# Altium PCB Main.PcbDoc
Units mil, origin at the board's own origin, x right, y up, seen from the top; angles counter-clockwise.
Board outline 2430 x 2950 mil, 2 copper layers (Top Layer, Bottom Layer); 33 components, 26 nets, 160 pads, 36 vias.
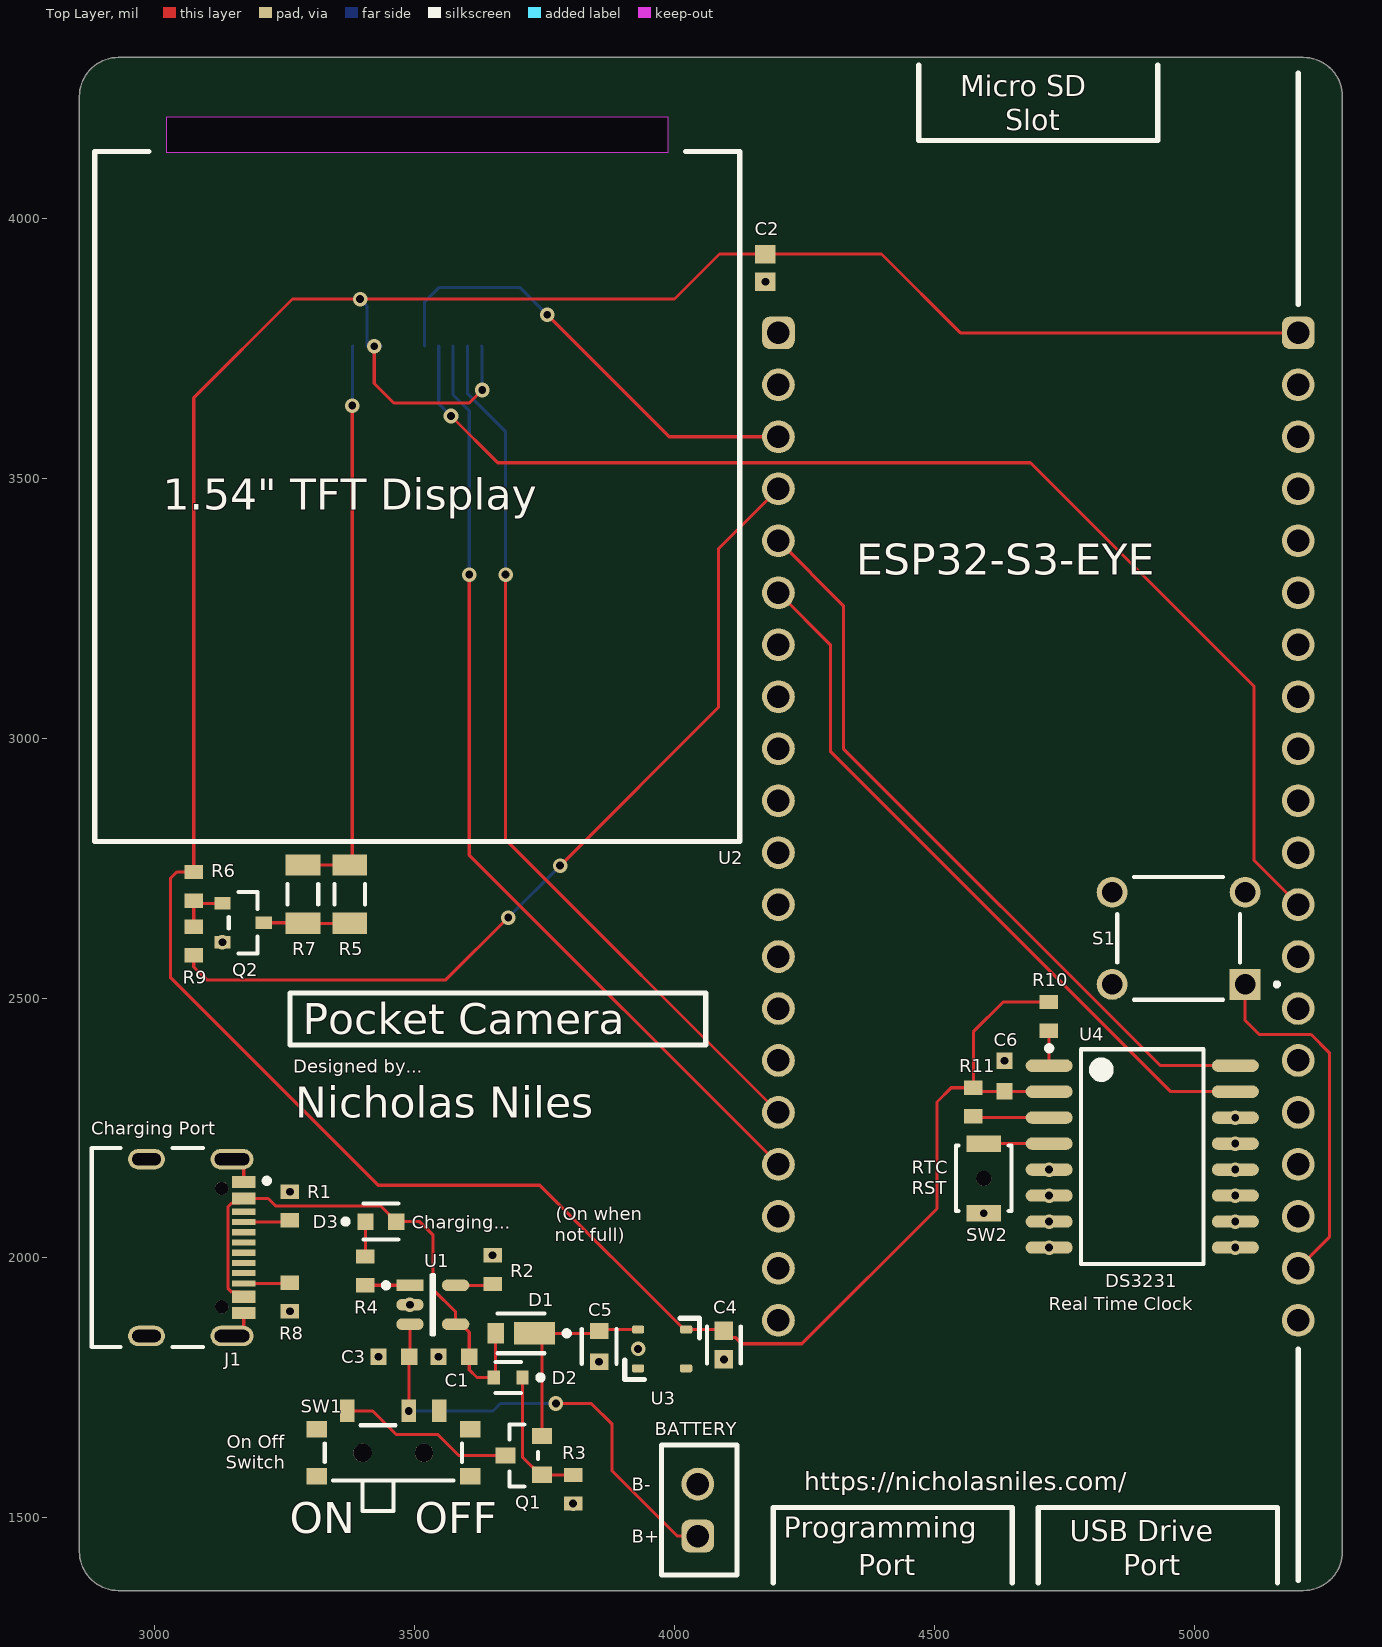
[diagram p0: Top Layer view]
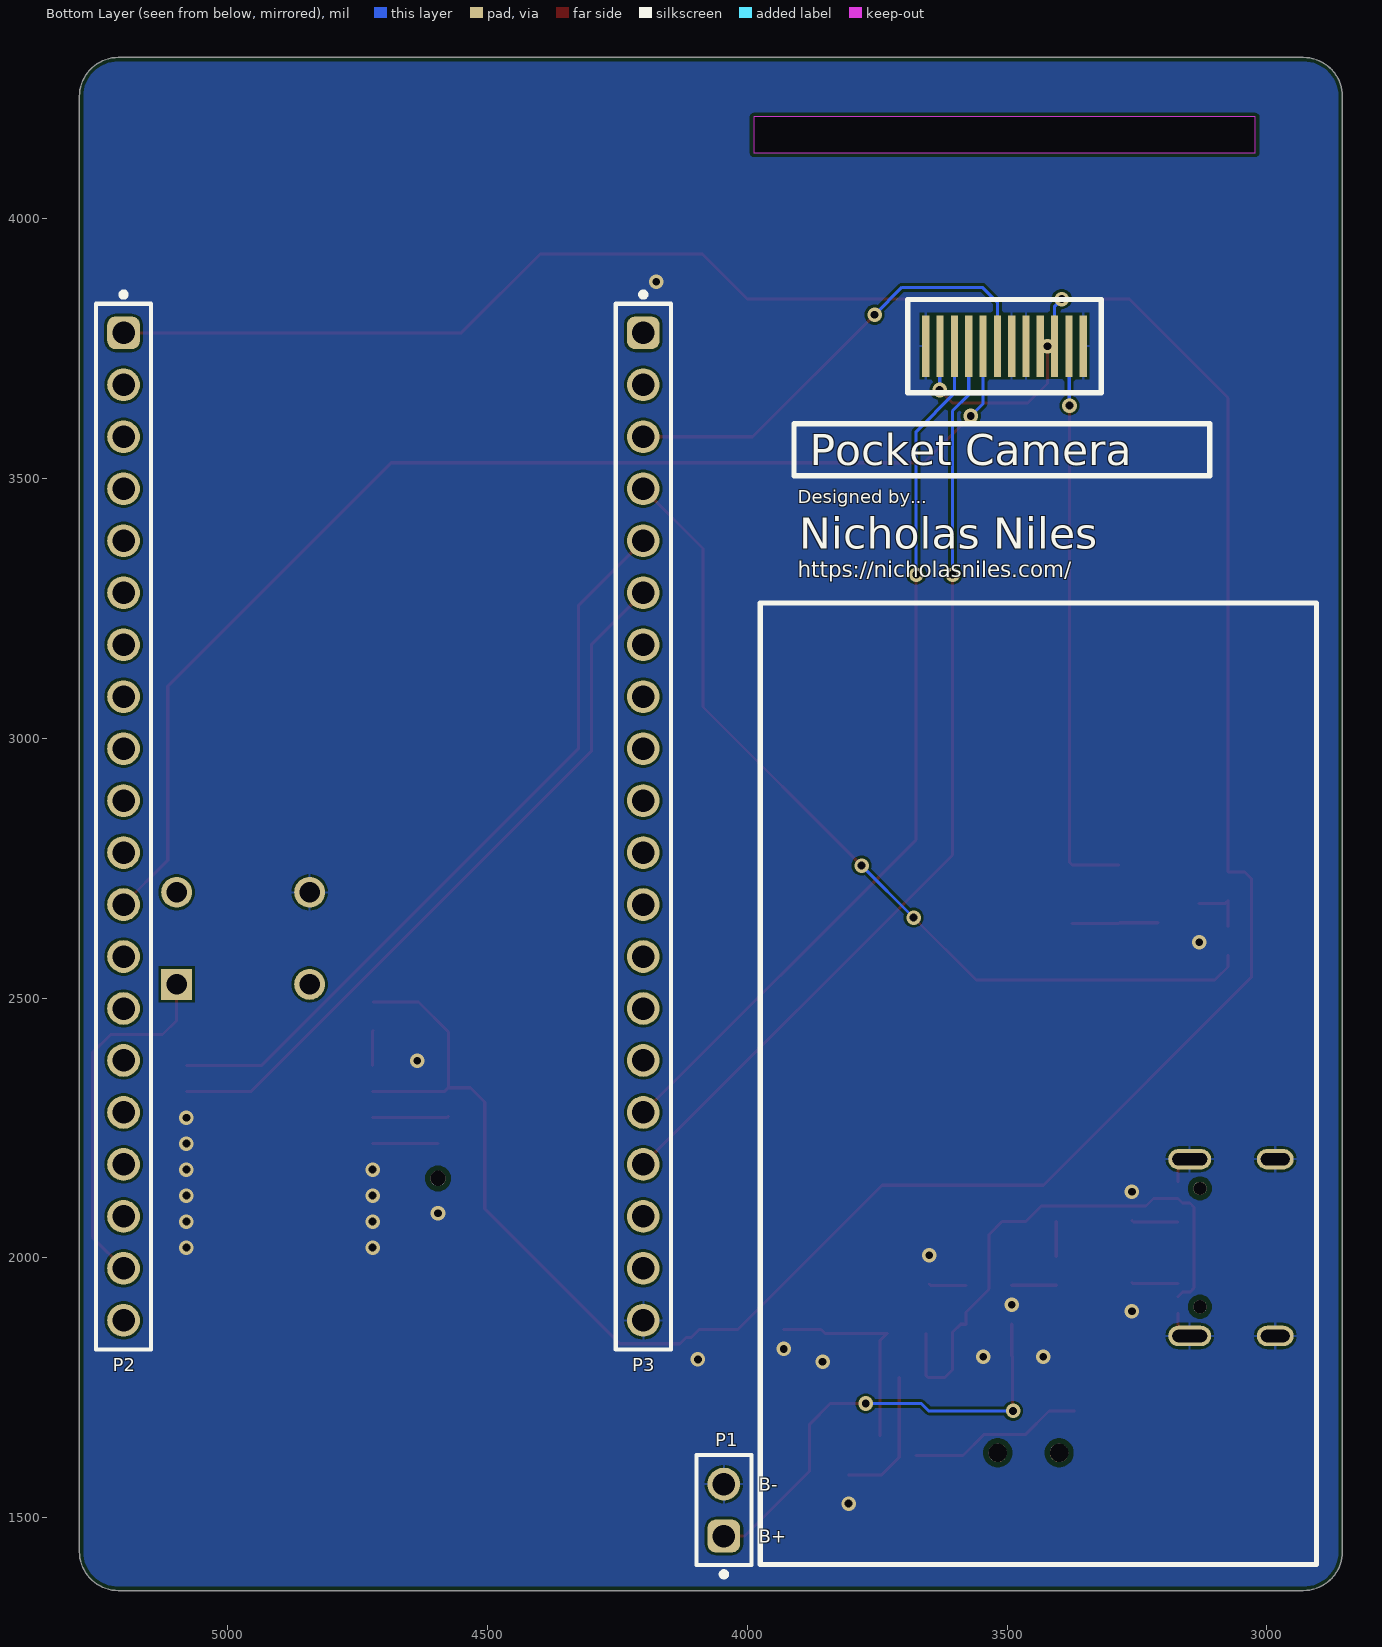
[diagram p1: Bottom Layer view, seen from below]
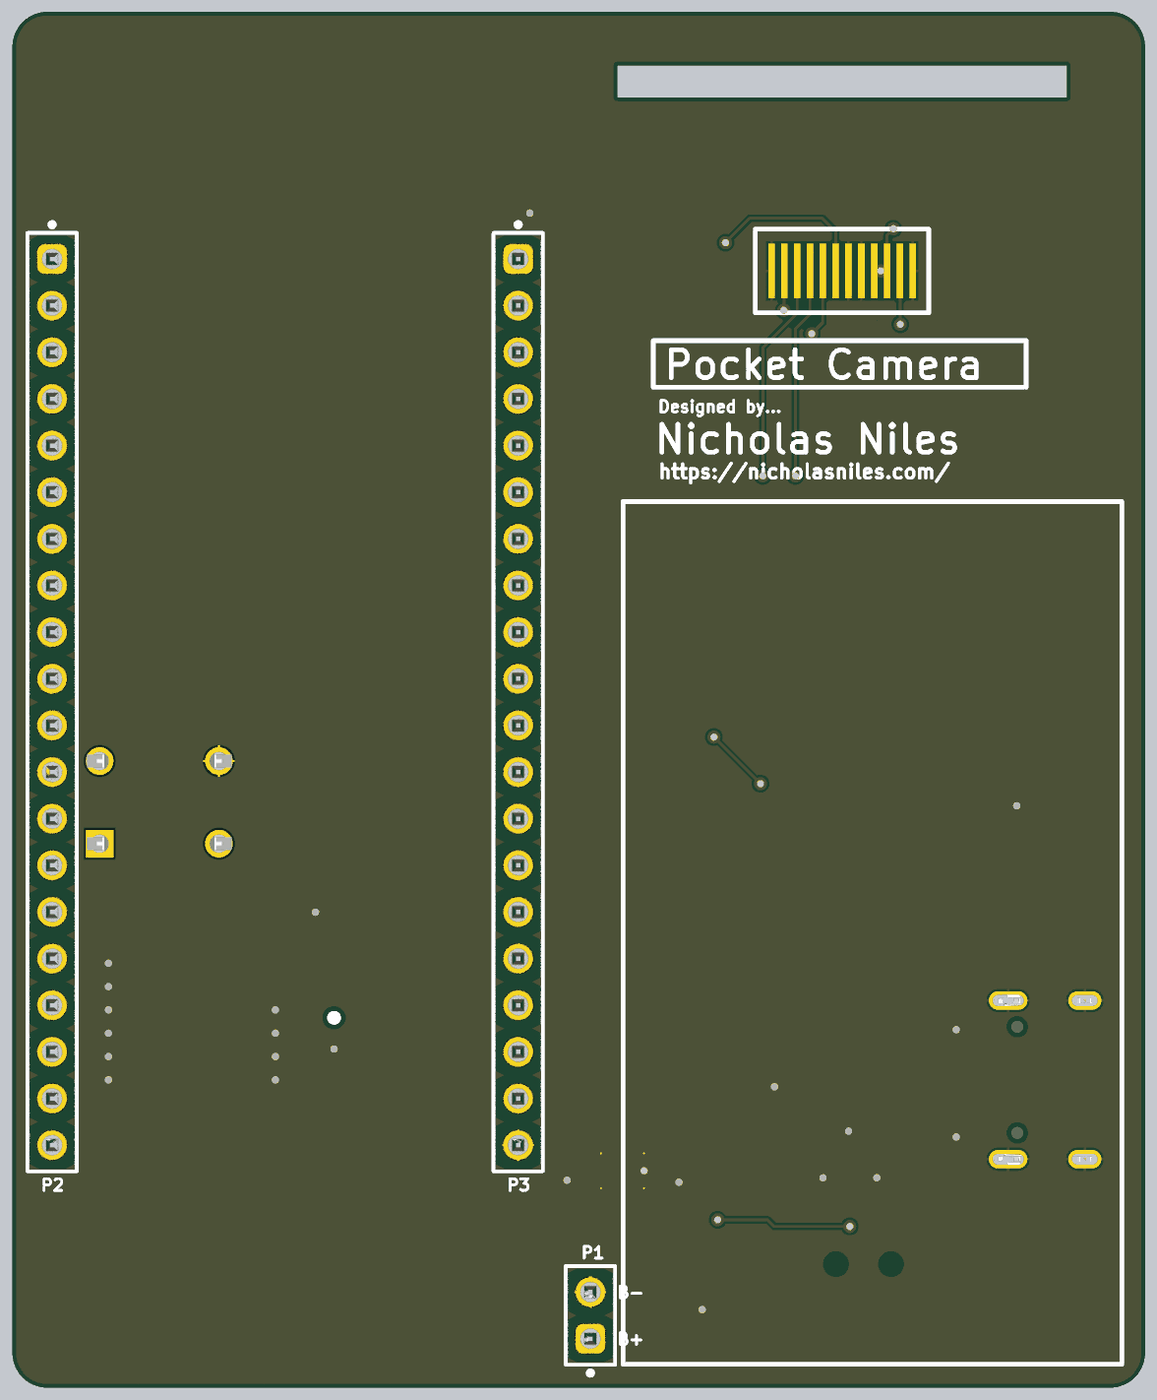
[diagram p2: 3D render of the assembled board from below, using the file's embedded part models]

## Layer stack, top to bottom
Top Solder: solder mask 0.4, Solder Resist, Dk 3.5
Top Layer: signal copper 1.4
Dielectric 1: dielectric 12.6, FR-4, Dk 4.8
Bottom Layer: signal copper 1.4
Bottom Solder: solder mask 0.4, Solder Resist, Dk 3.5

## Board outline
2855,1435 2855,4235 cw(c2930,4235) 2930,4310 5210,4310 cw(c5210,4235) 5285,4235 5285,1435 cw(c5210,1435) 5210,1360 2930,1360 cw(c2930,1435)

## Design rules (kind name [scope] priority, off if disabled: settings)
BoardOutlineClearance [All] p1: gap=7.87 ignorepadtopadclearanceinfootprint=FALSE
Clearance [All] p1: gap=5 ignorepadtopadclearanceinfootprint=TRUE except(10: Arc-Hole Track-Hole SMDPad-Hole THPad-Hole Via-Hole Fill-Hole Poly-Hole Region-Hole Text-Hole)
ComponentClearance [All] p1: gap=5 collisioncheckmode=3 verticalgap=5 showdistances=TRUE
DiffPairsRouting [All] p1: maxlimit=10 minlimit=5 mostfreqgap=5 toplayer_minwidth=5 toplayer_maxwidth=1000 toplayer_prefwidth=5 bottomlayer_minwidth=5 bottomlayer_maxwidth=1000 bottomlayer_prefwidth=5 maxuncoupledlength=500
Height [All] p1: minheight=0 maxheight=71497.94 prefheight=500
HoleSize [All] p1: absolutevalues=TRUE maxlimit=248.03 minlimit=11.81 maxpercent=80.000 minpercent=20.000
HoleToHoleClearance [All] p1: gap=10 allowstackedmicrovias=FALSE
MinimumAnnularRing [All] p1: minimumring=6
MinimumSolderMaskSliver [All] p1: minsoldermaskwidth=6
PlaneClearance [All] p1: clearance=5
PlaneConnect PlaneConnectPowerPads [InPadClass('PowerPads')] p1: planeconnectstyle=Direct reliefexpansion=20 reliefentries=4 reliefconductorwidth=10 reliefairgap=10
PlaneConnect [All] p2: pad.planeconnectstyle=Relief pad.reliefexpansion=11.81 pad.reliefentries=4 pad.reliefconductorwidth=5 pad.reliefairgap=5 via.planeconnectstyle=Direct via.reliefexpansion=11.81 via.reliefentries=4 via.reliefconductorwidth=5 via.reliefairgap=5
PolygonConnect PolygonConnectPowerPads [All vs (InPadClass('PowerPads'))] p1: connectstyle=Direct reliefconductorwidth=10 reliefentries=4 polygonreliefangle="90 Angle" airgapwidth=10
PolygonConnect [All] p2: thpad.connectstyle=Relief thpad.reliefconductorwidth=5 thpad.reliefentries=4 thpad.polygonreliefangle="90 Angle" thpad.airgapwidth=5 smdpad.connectstyle=Relief smdpad.reliefconductorwidth=5 smdpad.reliefentries=4 smdpad.polygonreliefangle="90 Angle" smdpad.airgapwidth=5 via.connectstyle=Direct via.reliefconductorwidth=5 via.reliefentries=4 via.polygonreliefangle="90 Angle" via.airgapwidth=5
RoutingVias [All] p1: holewidth=11.81 width=23.62 viastyle="Through Hole" minholewidth=11.81 minwidth=23.62 maxholewidth=23.62 maxwidth=259.84
SilkToSilkClearance [All] p1: silktosilkclearance=5
SilkToSolderMaskClearance [IsPad] p1: minsilkscreentomaskgap=5 clearancetoexposedcopper=TRUE
SolderMaskExpansion [All] p1: expansion=2 istentingtop=FALSE
SupplyNets "Schematic Supply Nets_4" [InNet('USB_VCC')] p1: voltage=0.000
SupplyNets "Schematic Supply Nets_3" [InNet('BUCK_IN')] p2: voltage=0.000
SupplyNets "Schematic Supply Nets_2" [InNet('GND')] p3: voltage=0.000
SupplyNets "Schematic Supply Nets_1" [InNet('3V3')] p4: voltage=0.000
SupplyNets "Schematic Supply Nets" [InNet('VBAT')] p5: voltage=0.000
UnRoutedNet [All] p1: checkbadconnections=TRUE
Width Width_10mil [All] p1: maxlimit=6 minlimit=6 preferedwidth=6 minimp=50.000000 maximp=50.000000 favimp=50.000000
Width Width_6mil [All] p2: maxlimit=1000 minlimit=6 preferedwidth=6 minimp=50.000000 maximp=50.000000 favimp=50.000000
Width Power_20mil [All] p3: maxlimit=1000 minlimit=20 preferedwidth=20 minimp=50.000000 maximp=50.000000 favimp=50.000000
Width Power_12mil [All] p4: maxlimit=1000 minlimit=12 preferedwidth=12 minimp=50.000000 maximp=50.000000 favimp=50.000000
Width Width_5mil [All] p5: maxlimit=1000 minlimit=5 preferedwidth=5 minimp=50.000000 maximp=50.000000 favimp=50.000000
19 further rules are at their usual default settings.

## Components (designator, comment, footprint, x,y, rotation, side; value= is the part's Value field where it differs from the comment)
C1 "4.7µF" WCAP-CSGP_0603_L1.6W0.8H0.8_Reflow 3575.47,1810 r0 top
C2 "100nF" CAPC1608X87X35NL15T15 4175,3905 r270 top
C3 "4.7µF" WCAP-CSGP_0603_L1.6W0.8H0.8_Reflow 3460,1810 r0 top
C4 "10uF 16V" FP-CC0603-DC-MFG 4095,1832.44 r270 top
C5 "4.7uF 16V" FP-CC0603-DA-MFG 3855,1830 r270 top value="4.7 uF"
C6 "1uF" WCAP-CSGP_0603_L1.6W0.8H0.8_Reflow 4635,2350 r270 top
D1 "NRVBSS14HE" FP-477AD-MFG 3705,1855 r180 top
D2 "1N4148WT-7" FP-SOD523-MFG 3680,1770 r180 top
D3 "LTST-C190KGKT" FP-LTST-C190KGKT-MFG 3435,2070 r0 top
J1 "USB4105-GF-A" FP-USB4105-GF-A-MFG 3030,2020 r270 top
P1 "61300211121" 61300211121 4045,1515 r90 bottom
P2 "61302011121" 61302011121 5200,2830 r270 bottom
P3 "61302011121" 61302011121 4200,2830 r270 bottom
Q1 "IRLML6402TRPBF" FP-Micro3-MFG 3710,1620 r180 top
Q2 "SS8050-G" FP-SS8050-G-MFG 3170,2645 r0 top
R1 "5.1kΩ" RESC1608X55X25NL10T15 3260,2100 r270 top
R2 "10kΩ" RESC1608X55X25NL10T15 3650,1977.56 r90 top
R3 "10kΩ" RESC1608X55X25NL10T15 3805,1555 r270 top
R4 "1kΩ" RESC1608X55X25NL10T15 3405,1975.12 r270 top
R5 "20" RESC3116X65X40NL10T20 3375,2700 r90 top
R6 "10k" RESC1608X55X25NL10T15 3075,2715 r90 top
R7 "20" RESC3116X65X40NL10T20 3285,2700 r90 top
R8 "5.1kΩ" RESC1608X55X25NL10T15 3260,1925 r90 top
R9 "1k" RESC1608X55X25NL10T15 3075,2610 r90 top
R10 "10k" RESC1608X55X25NL10T15 4720,2465 r270 top
R11 "10k" RESC1608X55X25NL10T15 4575,2300 r270 top
S1 "SWT0325-073016TSK_REVA" SW_SWT0325-073016TSK_REVA 4970,2615 r180 top
SW1 "450404015514" 450404015514 -46540.94,-48375 r180 top
SW2 "RST" FP-B3U-1000P-B-MFG 4595,2153.07 r90 top
U1 "MCP73831T-2ACI/OT" FP-C04-091-OT-IPC_B 3535,1910 r0 top
U2 "1.54\" TFT Display" PCBComponent_1 3505,3465 r180 top
U3 "S-1317A33-M5T1U4" S-1317A33-M5T1U4 3985,1825 r270 top
U4 "DS3231SN/T&R" W16-H2_N 4900,2195 r0 top

## Footprints (in the part's own frame and the unit in brackets; to place one, negate y for a bottom-side part, rotate by r counter-clockwise, add the part's x,y. Pads: shape width x height; smd on the part's side, far side on the other; paste and mask are expansions set on the pad)
61300211121 [mm] "Pin Header, pitch 2.54 mm, THT, Vertical, single row, 2p"
  rrect50% 1.6x1.6 hole 1.1: 1(-1.27,0)
  round 1.6 hole 1.1: 2(1.27,0)
  silkscreen extent -3.26,-1.35 2.69,1.35, body extent -2.54,-1.27 2.54,1.27, height 8.57
61302011121 [mm] "Pin Header, pitch 2.54 mm, THT, Vertical, single row, 20p"
  rrect50% 1.6x1.6 hole 1.1: 1(-24.13,0)
  round 1.6 hole 1.1: 2(-21.59,0) 3(-19.05,0) 4(-16.51,0) 5(-13.97,0) 6(-11.43,0) 7(-8.89,0) 8(-6.35,0) 9(-3.81,0) 10(-1.27,0) 11(1.27,0) 12(3.81,0) 13(6.35,0) 14(8.89,0) 15(11.43,0) 16(13.97,0) 17(16.51,0) 18(19.05,0) 19(21.59,0) 20(24.13,0)
  silkscreen extent -26.12,-1.35 25.55,1.35, body extent -25.4,-1.27 25.4,1.27, height 8.57
450404015514 [mm] "Right angle Slide Switch"
  rect 0.7x1.1 smd: COM(-1270.75,-1272.05) L1(-1267.75,-1272.05) L2(-1272.25,-1272.05)
  round 0.9 hole 0.9 unplated: M1(-1271.5,-1270) M2(-1268.5,-1270)
  rect 1x0.8 smd: M3(-1273.75,-1268.85) M4(-1266.25,-1268.85) M5(-1273.75,-1271.15) M6(-1266.25,-1271.15)
  silkscreen extent -1273.35,-1271.35 -1266.65,-1267.15, body extent -1273.85,-1272.25 -1266.15,-1267.12, height 1.4
CAPC1608X87X35NL15T15 [mm] "Chip Capacitor, 2-Leads, Body 1.60x0.80mm, IPC Medium Density"
  rect 0.9x1 smd: 1(-0.675,0) 2(0.675,0)
  body extent -0.87,-0.48 0.87,0.47, height 0.87
FP-477AD-MFG [mm]
  rect 2x1.1 smd paste+0 mask+0: 1(-0.65,0)
  rect 0.8x1 smd paste+0 mask+0: 2(1.25,0)
  silkscreen extent -2.35,-0.97 1.15,0.97, body extent -1.75,-0.8 1.75,0.8, height 0.25
FP-B3U-1000P-B-MFG [mm]
  rect 0.8x1.7 smd paste+0 mask+0: 1(-1.7,0) 2(1.7,0)
  round 0.75 hole 0.75 unplated paste-2539.97 mask+0: ""(0,0)
  silkscreen extent -1.6,-1.35 1.6,1.35, body extent -2.2,-1.45 2.2,1.45, height 0.25
FP-C04-091-OT-IPC_B [mm]
  rect 1.338x0.578 smd paste+0 mask+0: 1(-1.116,0.95)
  rrect100% 1.338x0.578 smd paste+0 mask+0: 2(-1.116,0) 3(-1.116,-0.95) 4(1.116,-0.95) 5(1.116,0.95)
  silkscreen extent -2.41,-1.45 0.05,1.45
FP-CC0603-DA-MFG [mm]
  rect 0.8x0.9 smd paste+0 mask+0: 1(-0.75,0) 2(0.75,0)
  silkscreen extent -0.85,-0.85 0.85,0.85, body extent -1.35,-0.75 1.35,0.75, height 0.25
FP-CC0603-DC-MFG [mm]
  rect 0.9x0.9 smd paste+0 mask+0: 1(-0.7,0) 2(0.7,0)
  silkscreen extent -0.9,-0.82 0.9,0.82, body extent -1.35,-0.75 1.35,0.75, height 0.25
FP-LTST-C190KGKT-MFG [mm]
  rect 0.8x0.8 smd paste+0 mask+0: 1(-0.75,0) 2(0.75,0)
  silkscreen extent -1.85,-0.87 0.85,0.87, body extent -1.25,-0.55 1.25,0.55, height 0.25
FP-Micro3-MFG [mm]
  rect 0.972x0.802 smd paste+0 mask+0: 1(-0.885,0.95) 2(-0.885,-0.95) 3(0.885,0)
  silkscreen extent -0.7,-1.52 0.7,1.52, body extent -1.47,-1.87 1.47,1.87, height 0.25
FP-SOD523-MFG [mm]
  rect 0.6x0.7 smd paste+0 mask+0: 1(-0.7,0) 2(0.7,0)
  silkscreen extent -1.7,-0.75 0.63,0.75, body extent -1.1,-0.53 1.1,0.53, height 0.25
FP-SS8050-G-MFG [mm]
  rect 0.8x0.6 smd paste+0 mask+0: 1(-1.01,0.95) 2(-1.01,-0.95) 3(1.01,0)
  silkscreen extent -0.7,-1.5 0.7,1.5, body extent -1.51,-1.6 1.51,1.6, height 0.25
FP-USB4105-GF-A-MFG [mm]
  rrect100% 1x2.1 hole 1.7 slot 0.6 at 0 deg paste-2539.97 mask+0: 1(-4.32,3.015) 2(4.32,3.015)
  rrect100% 1x1.8 hole 1.4 slot 0.6 at 0 deg paste-2539.97 mask+0: 3(-4.32,-1.165) 4(4.32,-1.165)
  rect 0.6x1.15 smd paste+0 mask+0: A1-B12(-3.2,3.59) A4-B9(-2.4,3.59) B1-A12(3.2,3.59) B4-A9(2.4,3.59)
  rect 0.3x1.15 smd paste+0 mask+0: A5(-1.25,3.59) A6(-0.25,3.59) A7(0.25,3.59) A8(1.25,3.59) B5(1.75,3.59) B6(0.75,3.59) B7(-0.75,3.59) B8(-1.75,3.59)
  round 0.65 hole 0.65 unplated paste-2539.97 mask+0: ""(-2.89,2.515) ""(2.89,2.515)
  silkscreen extent -4.86,-3.84 4.86,4.84, body extent -4.79,-3.76 4.79,3.77, height 3.26
PCBComponent_1 [mm]
  rect 0x0 / inner rect 1.524x1.524 / far side rect 0.35x3 all layers, no hole mask+0: 1(3.85,-7.35) 2(3.15,-7.35) 3(2.45,-7.35) 4(1.75,-7.35) 5(1.05,-7.35) 6(0.35,-7.35) 7(-0.35,-7.35) 8(-1.05,-7.35) 9(-1.75,-7.35) 10(-2.45,-7.35) 11(-3.15,-7.35) 12(-3.85,-7.35)
  Keep-Out Layer board cut-out: -12.25,-16.8 12.25,-16.8 12.25,-18.55 -12.25,-18.55
  silkscreen extent -15.76,-16.86 15.76,16.86
RESC1608X55X25NL10T15 [mm] "Chip Resistor, 2-Leads, Body 1.60x0.80mm, IPC Medium Density"
  rect 0.7x0.9 smd: 1(-0.7,0) 2(0.7,0)
  body extent -0.85,-0.45 0.85,0.45, height 0.55
RESC3116X65X40NL10T20 [mm] "Chip Resistor, 2-Leads, Body 3.10x1.60mm, IPC Medium Density"
  rect 1.05x1.7 smd: 1(-1.425,0) 2(1.425,0)
  silkscreen extent -0.5,-0.75 0.5,0.75, body extent -1.6,-0.85 1.6,0.85, height 0.65
S-1317A33-M5T1U4 [mm]
  rrect50% 0.4x0.6 / inner round 0 / far side round 0 all layers, no hole: 1(-0.95,-1.4) 2(0,-1.4) 3(0.95,-1.4) 4(0.95,0.95) 5(-0.95,0.95)
  silkscreen extent -1.5,-2.05 1.5,1.6
SW_SWT0325-073016TSK_REVA [mm]
  rect 1.508x1.508 / inner round 1.508 / far side rect 1.508x1.508 hole 1 mask+0.102: 1(-3.25,2.25)
  round 1.508 hole 1 mask+0.102: 2(3.25,2.25) 3(-3.25,-2.25) 4(3.25,-2.25)
  silkscreen extent -4.9,-3 3,3, body extent -3.95,-3 3.95,3, height 7.3
W16-H2_N [mm] "SOIC, 16-Leads, Body 10.3x7.5mm, Pitch 1.27mm, IPC Medium Density"
  oval 2.3x0.6 smd: 1(-4.55,4.445) 2(-4.55,3.175) 3(-4.55,1.905) 4(-4.55,0.635) 5(-4.55,-0.635) 6(-4.55,-1.905) 7(-4.55,-3.175) 8(-4.55,-4.445) 9(4.55,-4.445) 10(4.55,-3.175) 11(4.55,-1.905) 12(4.55,-0.635) 13(4.55,0.635) 14(4.55,1.905) 15(4.55,3.175) 16(4.55,4.445)
  silkscreen extent -4.67,-5.25 3,5.42, body extent -3.8,-5.25 3.8,5.25, height 2.65
WCAP-CSGP_0603_L1.6W0.8H0.8_Reflow [mm] "Ceramic Capacitors, body 1.6x0.8mm"
  rect 0.8x0.8 smd: 1(-0.75,0) 2(0.75,0)
  body extent -0.8,-0.4 0.8,0.4, height 0.8

## Part data
C1 C3 C6: library part CMP-207839-000060-3
C2: library part CMP-2006-03301-1
C4: library part CMP-00621-81932632-1, "CM105X5R106K16AT", Capacitance=10µF, Case/Package=0603, Dielectric=X5R, Max Operating Temperature=85°C, Min Operating Temperature=-55°C, Tolerance=10%, Voltage Rating=16V, Halogen Free="Halogen Free", Height=1mm, Lead Free="Lead Free", Material=Ceramic, NexarPartId=81932632, RoHS=Non-Compliant, Voltage Rating (DC)=16V
C5: library part CMP-03422-001236-1, "GRM188Z71C475KE21D", Capacitance="4.7 uF", Manufacturer=YAGEO, Manufacturer Part Number=CC0603KRX5R7BB475, Package=CC0603-DA, Temperature="-55°C to +125°C", Temperature Characteristic=X5R, Temperature Coefficient=15%, Temperature Range High=+125°C, Temperature Range Low=-55°C, Tolerance=0.1, Voltage="16 V", Automotive=No, Category=Cap, Device Class L1="Passive Components", Device Class L2=Capacitors, Device Class L3="Ceramic Capacitors", Digikey Description="CAP CER 4.7UF 16V X5R 0603", Footprint Url=http://www.yageo.com/exep/pages/download/literatures/UPY-C_GEN_24.pdf, Height=0.9mm, Lead Free=Yes, Material=Ceramic, Mouser Description="Multilayer Ceramic Capacitors MLCC - SMD/SMT 4.7uF 16V X5R 10%", Octopart=https://octopart.com/cc0603krx5r7bb475-yageo-34978295, RoHS=TRUE, Voltage Rating="16 V"
D1: library part CMP-00278-93203856-2, "NRVBSS14HE Rectifier Diode, Schottky, 1 Phase, 1 Element, 1A, 40V V(RRM), Silicon", Capacitance=55pF, Forward Current=1A, Manufacturer Lifecycle Status=ACTIVE, Max Forward Surge Current (Ifsm)=25A, Max Junction Temperature (Tj)=150°C, Max Repetitive Reverse Voltage (Vrrm)=40V, Min Operating Temperature=-55°C, Peak Reverse Current=5µA, Height=750µm, Lifecycle Status=Production, Max Operating Temperature=150°C, NexarPartId=93203856, Reverse Voltage=40V, RoHS=Compliant
D2: library part CMP-2000-05518-3, "DIODE GEN PURP 80V 125MA SOD523", Average Rectified Current=125mA, Capacitance=2pF, Forward Current=250mA, Forward Voltage=1.25V, Max Forward Surge Current (Ifsm)=2A, Max Operating Temperature=150°C, Max Repetitive Reverse Voltage (Vrrm)=100V, Max Reverse Voltage (DC)=80V, Min Operating Temperature=-65°C, Package Quantity=3000, Peak Reverse Current=1uA, Power Dissipation=150mW, Contact Plating=Tin, Current Rating=125mA, Element Configuration=Single, Height=0.65mm, Lead Free="Lead Free", Length=0.9mm, Max Surge Current=2A, Mount="Surface Mount", Number of Pins=2, Output Current=125mA, Packaging="Tape and Reel", Peak Non-Repetitive Surge Current=2A, Polarity=Standard, Power Rating=150mW, Radiation Hardening=No, REACH SVHC="No SVHC", Recovery Time=4ns, Reverse Recovery Time=4ns, Voltage Rating (DC)=80V, Weight=3.5E-05oz, Width=1.3mm
D3: library part CMP-2000-05197-2, "LED GREEN CLEAR CHIP SMD", Case Code (Imperial)=0603, Case Code (Metric)=1608, Color=Green, Forward Current=30mA, Forward Voltage=2V, Lens Color=Colorless, Max Operating Temperature=85°C, Min Operating Temperature=-55°C, Package Quantity=1, Power Dissipation=75mW, Reverse Voltage=5V, Test Current=20mA, Case/Package=0603, Depth=0.8mm, Dominant Wavelength=571nm, Height=0.8mm, Illumination Color=Green, Lead Free="Lead Free", Length=1.6mm, Lens Style=Diffused, Lens Transparency=Clear, Luminous Intensity=35mcd, Mount="Surface Mount", Number of Elements=1, Number of LEDs=1, Number of Pins=2, Packaging="Tape and Reel", Power Rating=75mW, Radiation Hardening=No, Viewing Angle=130°, Wavelength=574nm, Width=0.8mm
J1: library part CMP-245163-000001-1, "CONN RCPT USB2.0 TYPEC 5A", Current Rating=5/6.25/1.25/0.25A, Manufacturer=GCT, Package=0, Temperature="-40°C to +85°C", Temperature Range High=+85°C, Temperature Range Low=-40°C, Voltage Rating=20V, Automotive=No, Category=Conn, ComponentLink2Description=Datasheet, ComponentLink2URL=https://gct.co/files/drawings/usb4105.pdf, Conn Orientation="Right Angle", Contact Material=Gold,Nickel, Device Class L1=Connectors, Device Class L2="USB Connectors", Device Class L3=unset, Digikey Description="CONN RCPT USB2.0 TYPEC 5A", Height=3.46mm, Is Female=yes, Lead Free=Yes, Manufacturer Part Number=USB4105-GF-A, Number of Contacts=16, Octopart=https://octopart.com/usb4105-gf-a-gct-106627878, RoHS=TRUE, Usb Standard="USB 2.0"
P1: library part CMP-1712-00002-6, Color=Black, Contact Resistance=20mΩ, Current Rating=3A, Max Operating Temperature=125°C, Min Operating Temperature=-40°C, Operating Supply Voltage=250V, Connector Type="Male Pin", Contact Gender=Male, Contact Material=Copper, Contact Mating Length=5.9944mm, Contact Plating=Gold, Gender=Male, Height=8.94mm, Housing Material=PBT, Lead Free="Lead Free", Lead Pitch=2.54mm, Mount="Through Hole", NexarPartId=20081794, Number of Contacts=2, Number of Pins=2, Number of Positions=2, Number of Rows=1, Orientation=Vertical, Packaging=Bulk, Pitch=2.54mm, REACH SVHC="No SVHC", RoHS=Compliant, Termination="Through Hole", Voltage Rating=250V
P2 P3: library part CMP-1502-01102-4, "THT Vertical Pin Header WR-PHD, Pitch 2.54 mm, Single Row, 20 pins", Color=Black, Contact Resistance=20mΩ, Current Rating=3A, Operating Supply Voltage=250V, Connector Type="Male Pin", Contact Material=Copper, Contact Mating Length=5.9944mm, Contact Plating=Gold, Gender=Male, Lead Pitch=2.54mm, Mount="Through Hole", Number of Contacts=20, Number of Pins=20, Number of Positions=20, Number of Rows=1, Orientation=Vertical, Packaging=Bulk, Pitch=2.54mm, RoHS=Compliant, Termination=Solder
Q1: library part CMP-32901-000130-1, "MOSFET P-CH 20V 3.7A SOT-23", Continuous Drain Current=-3.7A, Drain to Source Breakdown Voltage=-20V, Drain to Source Resistance=0.05Ω, Gate To Source Voltage=12V, Input Capacitace At Vds="633pF @ -10V", Manufacturer=Infineon, Max Forward Diode Voltage=-1.2V, Max Junction Temp=+150°C, Package=Micro3, Power Dissipation=1.3W, Pulse Drain Current=-22A, Temperature="-55°C to +150°C", Temperature Range Low=-55°C, Automotive=No, Category=Trans, ComponentLink2Description=Datasheet, ComponentLink2URL=https://www.infineon.com/dgdl/irlml6402pbf.pdf?fileId=5546d462533600a401535668d5c2263c, Depletion Mode=False, Device Class L1="Discrete Semiconductors", Device Class L2=Transistors, Device Class L3=MOSFETs, Digikey Description="MOSFET P-CH 20V 3.7A SOT-23", Drain To Source Voltage=-20V, Footprint Url=http://irf.com/package/outline/po_micro3.pdf, Gate Charge At Vgs="8nC @ -5V", Height=1.12mm, Ipc Land Pattern Name=SOT95P237X100-3, Lead Free=Yes, Manufacturer Part Number=IRLML6402TRPBF, Number of Channels=1, Number Of P Channels=1, Octopart=https://octopart.com/irlml6402trpbf-infineon-65874989, Reverse Recovery Charge=11nC, Reverse Recovery Time=29ns, RoHS=TRUE, Rthja Max=75°C/W, Standoff Height=0.01mm, Technology=MOSFET, Temperature Range High=+150°C, Threshold Vgs=-0.55V, Threshold Vgs Max=-1.2V, Threshold Vgs Min=-0.4V, Turn Off Delay Time=588ns, Turn On Delay Time=350ns
Q2: library part CMP-20235-000001-1, "NPN TRANSISTOR 1.5A 40V SOT-23 R", Case/Package=TO-236-3, Collector Emitter Breakdown Voltage=25V, Collector Emitter Voltage (VCEO)=400mV, Max Collector Current=1.5A, Max Power Dissipation=300mW, Transition Frequency=100MHz, Max Breakdown Voltage=25V, Mount="Surface Mount", Packaging="Tape and Reel", RoHS Compliant=Yes
R1 R2 R3 R4 R8 R10 R11: library part CMP-2000-04186-1
R5 R7: library part CMP-2003-03957-1, Manufacturer=Yageo, Part Number=RC1206JR-0720RL
R6 R9: library part CMP-2000-04525-1, Manufacturer=Yageo, Part Number=RT0603BRE071KL
S1: "6mm x 6mm Through Hole Tactile Switch", Package=None, Check_prices=https://www.snapeda.com/parts/SWT0325-073016TSK/Global+Connector+Technology/view-part/?ref=eda, MF="Global Connector Technology", MP=SWT0325-073016TSK, SnapEDA_Link=https://www.snapeda.com/parts/SWT0325-073016TSK/Global+Connector+Technology/view-part/?ref=snap
SW1: library part CMP-03913-99472344-1, "450404015514 Slide Switch, 0.3A, 5Vdc, Smd Rohs Compliant: Yes", Current Rating=300mA, Insulation Resistance=100MΩ, Max Operating Temperature=85°C, Min Operating Temperature=-40°C, Voltage Rating=5V, Contact Plating=Silver, NexarPartId=99472344, Packaging="Tape and Reel", RoHS=Compliant
SW2: library part CMP-08834-000005-1, "SWITCH TACTILE SPST-NO 0.05A 12V", Ambient Temperature Range High=+70°C, Ambient Temperature Range Low=-25°C, Contact Current Rating=50mA, Contact Resistance=100mΩ, Manufacturer=Omron, Manufacturer Part Number=B3U-1000P-B, Operating Force=1.5N, Package=0, Temperature="-25°C to +70°C", Voltage Rating DC=12V, Automotive=No, Category=Switch, ComponentLink2Description=Datasheet, ComponentLink2URL=https://omronfs.omron.com/en_US/ecb/products/pdf/en-b3u.pdf, Device Class L1=Electromechanical, Device Class L2=Switches, Device Class L3="Tactile Switches", Digikey Description="SWITCH TACTILE SPST-NO 0.05A 12V", Electromechanical Life=200000Cycles, Height=1.75mm, Lead Free=Yes, Mount="Surface Mount", Mouser Description="Tactile Switches Top Actuated with boss w/o ground", Octopart=https://octopart.com/b3u-1000p-b-omron-1057356, RoHS=TRUE, Temperature Range High=+70°C, Temperature Range Low=-25°C, Throw Configuration=SPST-NO
U1: library part CMP-0133-00143-2, "IC CONTROLLR LI-ION 4.2V SOT23-5", Case/Package=SOT-23, Drain to Source Resistance=350mR, Max Charge Current=500mA, Max Input Voltage=6V, Max Operating Temperature=85°C, Max Output Voltage=4.5V, Max Power Dissipation=1.54W, Min Operating Temperature=-40°C, Min Output Voltage=4.168V, Min Supply Voltage=3.75V, Output Voltage=4.2V, Voltage Rating=4.534V, Contact Plating=Tin, Height=0.051inch, Lead Free="Lead Free", Length=0.122inch, Max Supply Voltage=6V, Mount="Surface Mount", Number of Cells=1, Number of Channels=1, Number Of Outputs=1, Number of Pins=5, Output Current=500mA, Packaging="Tape and Reel", Radiation Hardening=No, REACH SVHC="No SVHC", Termination=SMD/SMT, Weight=0.00709oz, Width=0.071inch
U4: library part CMP-0254-00377-1, "Extremely Accurate I2C-Integrated Real-Time Clock/TCXO/Crystal, 16-Pin SO, -40 to 85 degC, Reel", Code_IPC=SOIC127P1030-16, Code_JEDEC=MS-013-AA, ComponentLink1Description="Manufacturer URL", ComponentLink1URL=http://www.maxim-ic.com, ComponentLink2Description=Datasheet, ComponentLink2URL=http://datasheets.maxim-ic.com/en/ds/DS3231.pdf, ComponentLink3Description="Package Specification", ComponentLink3URL=http://pdfserv.maxim-ic.com/package_dwgs/21-0042.PDF, DatasheetVersion="Rev 8, Jul-2010", PackageDescription="16-Pin Small-Outline IC, Wide (0.3in), 1.27 mm Pitch, SOIC (W)", PackageReference=W16-H2, PackageVersion="revD, 2010"

## Via types
v1: diameter 28, hole 15, Top Layer to Bottom Layer, tented both sides, 36 vias

## Nets (pads, with @x,y where several pads share a name; then routed paths per layer and width w, separated by ;. In a path a pad name is that pad's centre, name@x,y a point inside that pad or via, vN(x,y) a via of type N, cw(c..) or ccw(c..) an arc to the next point about the centre after c; other vN are vias at no path point)
3V3: C2.1 C4.1 C6.2 P2.1 R6.2 R10.1 R11.1 U2.3 U2.4 U2.11 U3.5 U4.2 | length 6562.4
  Top Layer w6: v1(3422.32,3754.37) 3422.32,3682.68 3460,3645 3605,3645 v1(3630,3670) ; R10.1 4632.56,2492.56 4575,2435 R11.1 ; U4.2 4635.47,2320 C6.2 4582.09,2320.47 R11.1 ; P2.1 4550,3780 4398.43,3931.57 C2.1 4086.57,3931.57 4000,3845 v1(3395,3845) 3265,3845 3075,3655 R6.2 3042.56,2742.56 3030,2730 3030,2540 3430,2140 3740.87,2140 4018.46,1862.4 U3.5 4092.6,1862.4 4108.35,1846.65 4117.81,1846.65 4129.46,1835 4245,1835 4505,2095 4505,2300 4532.56,2327.56 R11.1
  Bottom Layer w6: v1@3390,3850 3408.54,3831.46 U2.3 v1(3422.32,3754.37) U2.4 ; U2.11 3629.51,3753.88 3629.51,3670.49 v1(3630,3670)
BKL: P3.4 R9.1 | length 1727.9
  Top Layer w6: R9.1 3075,2560 3100,2535 3560,2535 v1(3680,2655) ; v1(3780,2755) 4085,3060 4085,3365 P3.4
  Bottom Layer w6: v1(3680,2655) v1(3780,2755)
BUCK_IN: C5.1 D1.1 Q1.2 U3.1 | length 405.9
  Top Layer w6: Q1.2 3744.84,1840.75 D1.1 3850.47,1855 C5.1 3857.87,1862.4 U3.1
CLK: P3.17 U2.9 | length 1833.7
  Top Layer w6: v1(3605,3315) 3605,2775 P3.17
  Bottom Layer w6: U2.9 3573.9,3661.1 3605,3630 v1(3605,3315)
CS: P2.12 U2.8 | length 2359.8
  Top Layer w6: v1(3570,3620) 3660,3530 4685,3530 5115,3100 5115,2765 P2.12
  Bottom Layer w6: U2.8 3546.34,3643.66 v1(3570,3620)
DC: P3.3 U2.7 | length 896.6
  Top Layer w6: v1(3755,3815) 3990,3580 P3.3
  Bottom Layer w6: U2.7 3518.78,3838.78 3547.51,3867.51 3702.49,3867.51 v1(3755,3815)
GND: C1.1 C2.2 C3.1 C4.2 C5.2 C6.1 J1.1 J1.2 J1.3 J1.4 J1.A1-B12 J1.B1-A12 P1.2 P3.20 Q2.2 R1.1 R2.2 R3.2 R8.1 S1.4 SW2.1 U1.2 U2.1 U2.5 U2.6 U2.12 U3.2 U4.5 U4.6 U4.7 U4.8 U4.9 U4.10 U4.11 U4.12 U4.13 U4.14 | length 115.4
  Top Layer w6: J1.2 3155.92,1849.92 3171.34,1865.34 J1.B1-A12 ; J1.1 3155.92,2190.08 3171.34,2174.66 J1.A1-B12
  other v1: 3805,1527.44 3855,1800.47 4095,1804.88 3430.47,1810 3545.94,1810 3929.88,1825 3260,1897.44 3491.05,1910 3650,2005.12 4720.87,2020 5079.13,2020 4720.87,2070 5079.13,2070 4595,2086.14 4720.87,2120 5079.13,2120 3260,2127.56 4720.87,2170 5079.13,2170 5079.13,2220 5079.13,2270 4635,2379.53 3130.24,2607.6 4175,3878.43
LEDK: R5.2 R7.2 U2.2 | length 1090.7
  Top Layer w6: R7.2 R5.2 3380,2761.1 v1(3380,3640)
  Bottom Layer w6: v1(3380,3640) 3380.49,3640.49 3380.49,3753.88 U2.2
MOSI: P3.16 U2.10 | length 1722.3
  Top Layer w6: v1(3675,3315) 3675,2805 P3.16
  Bottom Layer w6: U2.10 3601.46,3663.54 3675,3590 v1(3675,3315)
NetD2_1: D2.1 Q1.1 R3.1 | length 265
  Top Layer w6: D2.1 3707.56,1616.54 3741.5,1582.6 Q1.1 R3.1 R3.1
NetD3_1: D3.1 R4.1 | length 67.5
  Top Layer w6: R4.1 3405.47,2003.15 D3.1
NetJ1_A5: J1.A5 R1.2 | length 90
  Top Layer w6: J1.A5 3256.77,2069.21 R1.2
NetJ1_B5: J1.B5 R8.2 | length 89.3
  Top Layer w6: J1.B5 3258.54,1951.1 R8.2
NetQ1_3: Q1.3 SW1.L1 | length 340.2
  Top Layer w6: SW1.L1 3419.29,1705.71 3465,1660 3545,1660 3585,1620 Q1.3
NetQ2_1: Q2.1 R6.1 R9.2 | length 107.2
  Top Layer w6: R9.2 R6.1 3080.04,2682.4 Q2.1
NetQ2_3: Q2.3 R5.1 R7.1 | length 165.7
  Top Layer w6: Q2.3 3283.9,2645 R7.1 R5.1
NetR10_2: R10.2 U4.1 | length 67.8
  Top Layer w6: R10.2 4720.87,2436.57 U4.1
NetR11_2: R11.2 U4.3 | length 146.9
  Top Layer w6: R11.2 4577.44,2270 U4.3
PROG: R2.1 U1.5 | length 72.1
  Top Layer w6: U1.5 3647.4,1947.4 R2.1
RTC_RST: SW2.2 U4.4 | length 125.9
  Top Layer w6: SW2.2 U4.4
SCL: P3.5 U4.16 | length 1458.2
  Top Layer w6: P3.5@4200.28,3379.72 4325,3255 4325,2980 4935,2370 U4.16
SDA: P3.6 U4.15 | length 1396.9
  Top Layer w6: P3.6 4300,3180 4300,2975 4955,2320 U4.15
SHUTTER_BTN: P2.19 S1.1 | length 697
  Top Layer w6: S1.1 5097.95,2457.05 5125,2430 5225,2430 5260,2395 5260,2040 P2.19
STAT: R4.2 U1.1 | length 86.1
  Top Layer w6: R4.2 3490.9,1947.56 U1.1
USB_VCC: C1.2 D1.2 D2.2 D3.2 J1.A4-B9 J1.B4-A9 U1.4 | length 1058.7
  Top Layer w6: J1.B4-A9 3162.53,1934.32 3148.26,1934.32 3140.7,1941.88 3140.7,2098.12 3148.26,2105.68 3162.53,2105.68 J1.A4-B9 3218.24,2114.49 3232.73,2100 3434.53,2100 D3.2 3510,2070 3535,2045 3535,1940 3578.95,1896.05 U1.4 3589.38,1872.6 3605,1856.98 C1.2 3605,1785 3620,1770 D2.2 3655.79,1773.35 D1.2
VBAT: C3.2 P1.1 SW1.COM U1.3 | length 888.6
  Top Layer w6: v1(3488.58,1705.71) 3489.53,1706.65 C3.2 3491.05,1811.53 U1.3 ; v1(3771.95,1720) 3840,1720 3880,1680 3880,1590 4005,1465 P1.1
  Bottom Layer w6: v1(3488.58,1705.71) 3650.71,1705.71 3665,1720 v1(3771.95,1720)
pads on no net: J1. J1.A6 J1.A7 J1.A8 J1.B6 J1.B7 J1.B8 P2.2 P2.3 P2.4 P2.5 P2.6 P2.7 P2.8 P2.9 P2.10 P2.11 P2.13 P2.14 P2.15 P2.16 P2.17 P2.18 P2.20 P3.1 P3.2 P3.7 P3.8 P3.9 P3.10 P3.11 P3.12 P3.13 P3.14 P3.15 P3.18 P3.19 S1.2 S1.3 SW1.L2 SW1.M1 SW1.M2 SW1.M3 SW1.M4 SW1.M5 SW1.M6 SW2. U3.3 U3.4

## Polygon pours and split planes (outlines as drawn)
GND on Bottom Layer "GND_L02_P000" (solid, pour order 0): 2820,4337.5 5320,4337.5 5320,1332.5 2825,1332.5

## Silkscreen, mask and mechanical layers (free items; w line width, h text height)
Top Overlay:
  lines w10: 4190,1375 4190,1520 4650,1520 4650,1375 ; 4470,4295 4470,4150 4930,4150 4930,4295 ; 4700,1375 4700,1520 5160,1520 5160,1375 ; 5200,1380 5200,1825 ; 5200,3835 5200,4280 ; 3260,2410 4060,2410 4060,2510 3260,2510 3260,2410 ; 3975,1390 4120,1390 4120,1640 3975,1640 3975,1390
  text "Micro SD" at 4550.05,4235.01 h40
  text "Slot" at 4636.69,4170.01 h40
  text "ESP32-S3-EYE" at 4350.11,3315.01 h60
  text "Pocket Camera" at 3285.12,2430.01 h60
  text "Designed by..." at 3266.72,2356.67 h25
  text "Nicholas Niles" at 3270.13,2270.01 h60
  text "Charging Port" at 2877.97,2236.67 h25
  text "RTC" at 4456.68,2162.5 h25
  text "RST" at 4456.68,2122.5 h25
  text "(On when" at 3771.28,2072.5 h25
  text "Charging..." at 3494.21,2056.67 h25
  text "not full)" at 3769.2,2032.5 h25
  text "DS3231" at 4828.35,1944.01 h25
  text "Real Time Clock" at 4720.06,1899.01 h25
  text "BATTERY" at 3961.69,1659.01 h25
  text "On Off" at 3138.77,1634.01 h25
  text "Switch" at 3136.69,1594.01 h25
  text "B-" at 3917.35,1552.5 h25
  text "https://nicholasniles.com/" at 4249.3,1553.34 h35
  text "ON" at 3260.02,1470.01 h60
  text "OFF" at 3500.03,1470.01 h60
  text "Programming" at 4210.07,1461.67 h40
  text "USB Drive" at 4760.05,1455.01 h40
  text "B+" at 3917.35,1452.5 h25
  text "Port" at 4353.35,1390.01 h40
  text "Port" at 4863.35,1390.01 h40
Bottom Overlay:
  lines w10: 2905,1410 3975,1410 3975,3260 2905,3260 2905,1410 ; 3110,3505 3910,3505 3910,3605 3110,3605 3110,3505
  text "Pocket Camera" at 3879.88,3525.01 h60
  text "Designed by..." at 3903.28,3451.67 h25
  text "Nicholas Niles" at 3899.87,3365.01 h60
  text "https://nicholasniles.com/" at 3903,3310 h30
  text "B-" at 3977.65,1552.5 h25
  text "B+" at 3977.65,1452.5 h25
Mechanical 1:
  the board outline again, w10